# Altium PCB EnergyHarvestingBoard.PcbDoc
Units mil, origin at the board's own origin, x right, y up, seen from the top; angles counter-clockwise.
Board outline 6502 x 758 mil, 2 copper layers (Top Layer, Bottom Layer); 85 components, 43 nets, 173 pads, 64 vias.
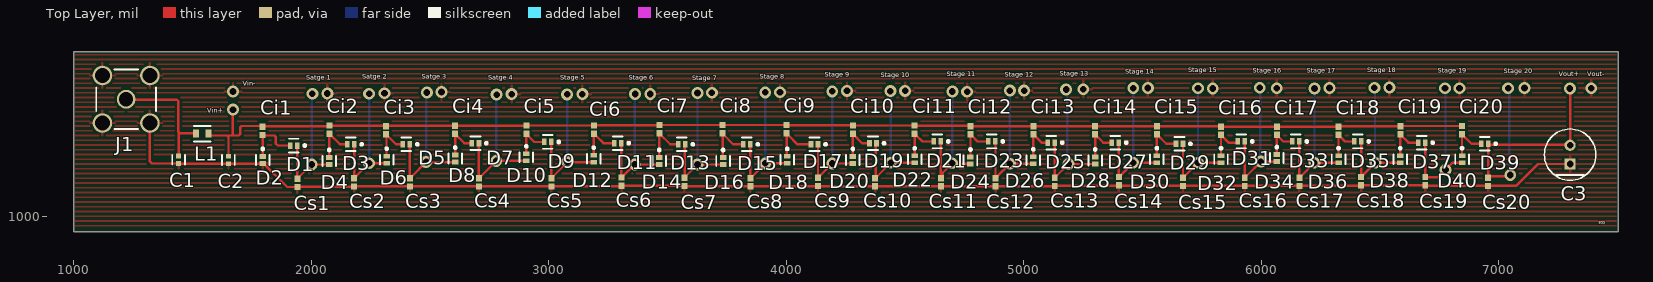
[diagram p0: Top Layer view]
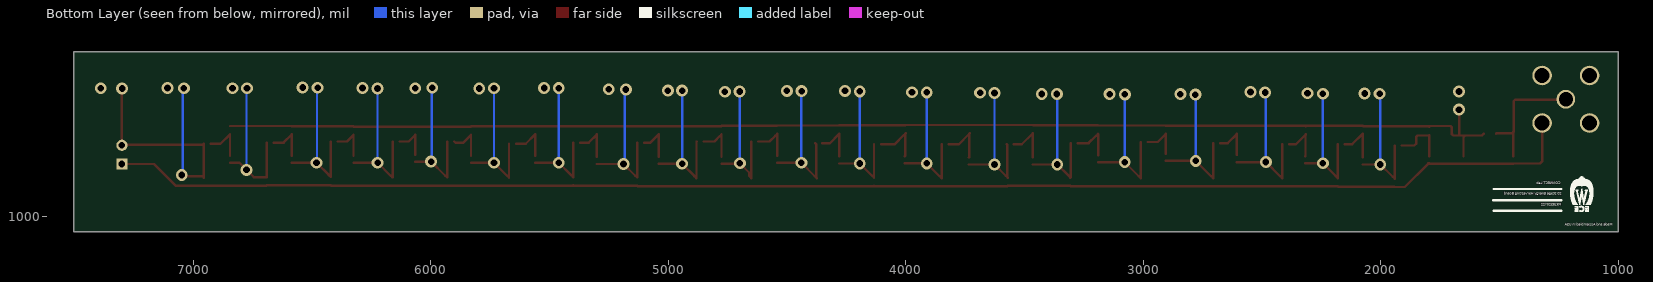
[diagram p1: Bottom Layer view, seen from below]
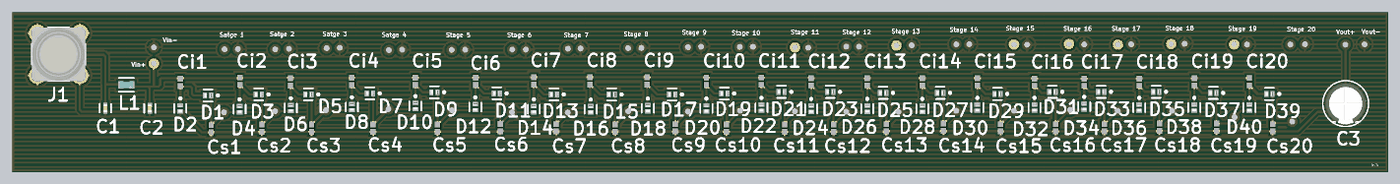
[diagram p2: 3D render of the assembled board from above, using the file's embedded part models]

## Layer stack, top to bottom
Top Solder: solder mask 0.4, Solder Resist, Dk 3.5
Top Layer: signal copper 1.4
Dielectric 1: dielectric 12.6, FR-4, Dk 4.8
Bottom Layer: signal copper 1.4
Bottom Solder: solder mask 0.4, Solder Resist, Dk 3.5

## Board outline
1000,934 7502,934 7502,1692 1000,1692

## Design rules (kind name [scope] priority, off if disabled: settings)
Clearance [All] p1: gap=10 ignorepadtopadclearanceinfootprint=TRUE except(0: Arc-Hole Track-Hole SMDPad-Hole THPad-Hole Via-Hole Fill-Hole Poly-Hole Region-Hole Text-Hole)
HoleSize [IsVia] p1: absolutevalues=TRUE maxlimit=100 minlimit=1 maxpercent=80.000 minpercent=20.000
MinimumSolderMaskSliver [All] p1: minsoldermaskwidth=1
PolygonConnect [All] p1: connectstyle=Relief reliefconductorwidth=10 reliefentries=4 polygonreliefangle="90 Angle" airgapwidth=10
RoutingVias [All] p1: holewidth=28 width=50 viastyle="Through Hole" minholewidth=28 minwidth=50 maxholewidth=28 maxwidth=50
SilkToSilkClearance [All] p1: silktosilkclearance=1
SolderMaskExpansion [All] p1: expansion=4 istentingtop=FALSE
Width [All] p1: maxlimit=10 minlimit=10 preferedwidth=10
27 further rules are at their usual default settings.

## Components (designator, comment, footprint, x,y, rotation, side; value= is the part's Value field where it differs from the comment)
C1 "1pF" FP-CBR04C-MFG 1440.75,1237.68 r270 top value="1.0 pF"
C2 "1.5pF" FP-CBR04C-MFG 1650.75,1236.93 r270 top value="1.5 pF"
C3 "EEUEB1JR47S" FP-RAD-TH-D_5_0_5-L_11_1-MFG 7300,1259.37 r90 top
Ci1 "47pF" CAPC1005X56X25NL10T15 1795,1359.65 r270 top
Ci2 "47pF" CAPC1005X56X25NL10T15 2075.75,1365 r270 top
Ci3 "47pF" CAPC1005X56X25NL10T15 2315,1361.97 r270 top
Ci4 "47pF" CAPC1005X56X25NL10T15 2605,1364.29 r270 top
Ci5 "47pF" CAPC1005X56X25NL10T15 2905,1364.65 r270 top
Ci6 "47pF" CAPC1005X56X25NL10T15 3190,1364.65 r270 top
Ci7 "47pF" CAPC1005X56X25NL10T15 3465,1366.97 r270 top
Ci8 "47pF" CAPC1005X56X25NL10T15 3730,1366.97 r270 top
Ci9 "47pF" CAPC1005X56X25NL10T15 4000,1366.97 r270 top
Ci10 "47pF" CAPC1005X56X25NL10T15 4280,1364.65 r270 top
Ci11 "47pF" CAPC1005X56X25NL10T15 4540,1365 r270 top
Ci12 "47pF" CAPC1005X56X25NL10T15 4775,1362.32 r270 top
Ci13 "47pF" CAPC1005X56X25NL10T15 5040,1362.32 r270 top
Ci14 "47pF" CAPC1005X56X25NL10T15 5300,1362.32 r270 top
Ci15 "47pF" CAPC1005X56X25NL10T15 5560,1362.32 r270 top
Ci16 "47pF" CAPC1005X56X25NL10T15 5830,1360 r270 top
Ci17 "47pF" CAPC1005X56X25NL10T15 6065,1360 r270 top
Ci18 "47pF" CAPC1005X56X25NL10T15 6325,1360 r270 top
Ci19 "47pF" CAPC1005X56X25NL10T15 6585,1362.32 r270 top
Ci20 "47pF" CAPC1005X56X25NL10T15 6845,1362.68 r270 top
Cs1 "47pF" CAPC1005X56X25NL10T15 1940.75,1140.35 r270 top
Cs2 "47pF" CAPC1005X56X25NL10T15 2180,1142.91 r270 top
Cs3 "47pF" CAPC1005X56X25NL10T15 2415,1142.91 r270 top
Cs4 "47pF" CAPC1005X56X25NL10T15 2705.35,1142.91 r270 top
Cs5 "47pF" CAPC1005X56X25NL10T15 3010,1142.91 r270 top
Cs6 "47pF" CAPC1005X56X25NL10T15 3306,1145.59 r270 top
Cs7 "47pF" CAPC1005X56X25NL10T15 3570,1145 r270 top
Cs8 "47pF" CAPC1005X56X25NL10T15 3848.39,1143 r270 top
Cs9 "47pF" CAPC1005X56X25NL10T15 4133,1145 r270 top
Cs10 "47pF" CAPC1005X56X25NL10T15 4374,1143 r270 top
Cs11 "47pF" CAPC1005X56X25NL10T15 4650,1143 r270 top
Cs12 "47pF" CAPC1005X56X25NL10T15 4881,1143.32 r270 top
Cs13 "47pF" CAPC1005X56X25NL10T15 5130,1145 r270 top
Cs14 "47pF" CAPC1005X56X25NL10T15 5400,1147.68 r270 top
Cs15 "47pF" CAPC1005X56X25NL10T15 5670,1145 r270 top
Cs16 "47pF" CAPC1005X56X25NL10T15 5930,1145 r270 top
Cs17 "47pF" CAPC1005X56X25NL10T15 6160,1145 r270 top
Cs18 "47pF" CAPC1005X56X25NL10T15 6420,1147.68 r270 top
Cs19 "47pF" CAPC1005X56X25NL10T15 6690,1147.68 r270 top
Cs20 "47pF" CAPC1005X56X25NL10T15 6955,1145 r270 top
D1 "CDBQR0130L" FP-0402-SOD-923F-MFG 1925.75,1297.68 r180 top
D2 "CDBQR0130L" FP-0402-SOD-923F-MFG 1795,1237.2 r270 top
D3 "CDBQR0130L" FP-0402-SOD-923F-MFG 2165.24,1302.91 r180 top
D4 "CDBQR0130L" FP-0402-SOD-923F-MFG 2075,1232.91 r270 top
D5 "CDBQR0130L" FP-0402-SOD-923F-MFG 2400,1302.91 r180 top
D6 "CDBQR0130L" FP-0402-SOD-923F-MFG 2317,1238.15 r270 top
D7 "CDBQR0130L" FP-0402-SOD-923F-MFG 2690.59,1307.91 r180 top
D8 "CDBQR0130L" FP-0402-SOD-923F-MFG 2605.35,1242.91 r270 top
D9 "CDBQR0130L" FP-0402-SOD-923F-MFG 2995,1312.91 r180 top
D10 "CDBQR0130L" FP-0402-SOD-923F-MFG 2905,1247.91 r270 top
D11 "CDBQR0130L" FP-0402-SOD-923F-MFG 3290,1307.91 r180 top
D12 "CDBQR0130L" FP-0402-SOD-923F-MFG 3188.39,1242.44 r270 top
D13 "CDBQR0130L" FP-0402-SOD-923F-MFG 3560,1302.91 r180 top
D14 "CDBQR0130L" FP-0402-SOD-923F-MFG 3465,1232.91 r270 top
D15 "CDBQR0130L" FP-0402-SOD-923F-MFG 3833.39,1302.68 r180 top
D16 "CDBQR0130L" FP-0402-SOD-923F-MFG 3733.39,1232.68 r270 top
D17 "CDBQR0130L" FP-0402-SOD-923F-MFG 4118.39,1302.68 r180 top
D18 "CDBQR0130L" FP-0402-SOD-923F-MFG 4003.39,1237.44 r270 top
D19 "CDBQR0130L" FP-0402-SOD-923F-MFG 4365,1306.97 r180 top
D20 "CDBQR0130L" FP-0402-SOD-923F-MFG 4280,1236.97 r270 top
D21 "CDBQR0130L" FP-0402-SOD-923F-MFG 4635,1315 r180 top
D22 "CDBQR0130L" FP-0402-SOD-923F-MFG 4540,1240 r270 top
D23 "CDBQR0130L" FP-0402-SOD-923F-MFG 4865,1315 r180 top
D24 "CDBQR0130L" FP-0402-SOD-923F-MFG 4775,1235 r270 top
D25 "CDBQR0130L" FP-0402-SOD-923F-MFG 5115,1310 r180 top
D26 "CDBQR0130L" FP-0402-SOD-923F-MFG 5040,1235.24 r270 top
D27 "CDBQR0130L" FP-0402-SOD-923F-MFG 5384.76,1310 r180 top
D28 "CDBQR0130L" FP-0402-SOD-923F-MFG 5300,1235 r270 top
D29 "CDBQR0130L" FP-0402-SOD-923F-MFG 5655,1305 r180 top
D30 "CDBQR0130L" FP-0402-SOD-923F-MFG 5560,1240.24 r270 top
D31 "CDBQR0130L" FP-0402-SOD-923F-MFG 5915,1315 r180 top
D32 "CDBQR0130L" FP-0402-SOD-923F-MFG 5830,1240.24 r270 top
D33 "CDBQR0130L" FP-0402-SOD-923F-MFG 6145.24,1315 r180 top
D34 "CDBQR0130L" FP-0402-SOD-923F-MFG 6065,1245 r270 top
D35 "CDBQR0130L" FP-0402-SOD-923F-MFG 6405.24,1315 r180 top
D36 "CDBQR0130L" FP-0402-SOD-923F-MFG 6325,1240 r270 top
D37 "CDBQR0130L" FP-0402-SOD-923F-MFG 6675,1310 r180 top
D38 "CDBQR0130L" FP-0402-SOD-923F-MFG 6585,1240.24 r270 top
D39 "CDBQR0130L" FP-0402-SOD-923F-MFG 6940,1305 r180 top
D40 "CDBQR0130L" FP-0402-SOD-923F-MFG 6845,1240 r270 top
J1 "5-1814832-1" TECO-5-1814832-1_V 1220,1492.68 r0 top
L1 "6.8nH" FP-LQW18AN_00-MFG 1540,1347.68 r0 top

## Footprints (in the part's own frame and the unit in brackets; to place one, negate y for a bottom-side part, rotate by r counter-clockwise, add the part's x,y. Pads: shape width x height; smd on the part's side, far side on the other; paste and mask are expansions set on the pad)
CAPC1005X56X25NL10T15 [mm] "Chip Capacitor, 2-Leads, Body 1.00x0.50mm, IPC Medium Density"
  rect 0.68x0.64 smd: 1(-0.44,0) 2(0.44,0)
  body extent -0.55,-0.3 0.55,0.3, height 0.56
FP-0402-SOD-923F-MFG [mm]
  rect 0.5x0.7 smd paste+0 mask+0: 1(-0.375,0) 2(0.375,0)
  silkscreen extent -1.3,-0.72 0.53,0.72, body extent -0.72,-0.45 0.72,0.45, height 0.25
FP-CBR04C-MFG [mm]
  rect 0.52x0.52 smd paste+0 mask+0: 1(-0.4,0) 2(0.4,0)
  silkscreen extent -0.53,-0.68 0.53,0.67, body extent -0.8,-0.4 0.8,0.4, height 0.25
FP-LQW18AN_00-MFG [mm]
  rect 0.625x0.85 smd paste+0 mask+0: 1(-0.663,0) 2(0.663,0)
  silkscreen extent -0.9,-0.82 0.9,0.82, body extent -1.07,-0.6 1.07,0.6, height 0.25
FP-RAD-TH-D_5_0_5-L_11_1-MFG [mm]
  rect 1.2x1.2 hole 0.7 paste-1000 mask+0: 1(-1,0)
  round 1.2 hole 0.7 paste-1000 mask+0: 2(1,0)
  silkscreen extent -2.75,-2.75 2.75,2.75, body extent -2.85,-2.85 2.85,2.85, height 0.25
TECO-5-1814832-1_V [mm] "THD, 5-Leads, Body 6.4x6.4mm, Pitch 5.08mm"
  round 2 hole 1.5: 1(0,0)
  round 2.1 hole 1.6: 2(-2.54,2.54) 3(-2.54,-2.54) 4(2.54,-2.54) 5(2.54,2.54)
  silkscreen extent -3.2,-3.2 3.2,3.2, body extent -3.21,-3.21 3.19,3.19, height 9.5

## Part data
C1: library part CMP-03020-014457-1, "CAP CER 1PF 100V C0G/NP0 0402", Capacitance="1.0 pF", Manufacturer=KEMET, Manufacturer Part Number=CBR04C109B1GAC, Package=CBR04C, Temperature="-55°C to +125°C", Temperature Characteristic=C0G, Temperature Coefficient=30ppm/°C, Temperature Range High=+125°C, Temperature Range Low=-55°C, Tolerance="0.1 pF", Voltage Rating="100 V", Automotive=No, Category=Cap, ComponentLink2Description=Datasheet, ComponentLink2URL=https://content.kemet.com/datasheets/KEM_C1030_CBR_SMD.pdf, Device Class L1="Passive Components", Device Class L2=Capacitors, Device Class L3="Ceramic Capacitors", Digikey Description="CAP CER 1PF 100V C0G/NP0 0402", Height=0.55mm, Ipc Land Pattern Name=CAPC10050X50, Lead Free=Yes, Material=Ceramic, Mouser Description="Cap Ceramic 1pF 100V C0G 0.1pF Pad SMD 0402 125C Medical T/R", Octopart=https://octopart.com/cbr04c109b1gac-kemet-23816354, RoHS=TRUE
C2: library part CMP-03020-033608-1, "CAP CER 1.5PF 100V C0G/NP0 0402", Capacitance="1.5 pF", Manufacturer=KEMET, Manufacturer Part Number=CBR04C159B1GAC, Package=CBR04C, Temperature="-55°C to +125°C", Temperature Characteristic=C0G, Temperature Coefficient=30ppm/°C, Temperature Range High=+125°C, Temperature Range Low=-55°C, Tolerance="0.1 pF", Voltage Rating="100 V", Automotive=No, Category=Cap, ComponentLink2Description=Datasheet, ComponentLink2URL=https://content.kemet.com/datasheets/KEM_C1030_CBR_SMD.pdf, Device Class L1="Passive Components", Device Class L2=Capacitors, Device Class L3="Ceramic Capacitors", Digikey Description="CAP CER 1.5PF 100V C0G/NP0 0402", Height=0.55mm, Ipc Land Pattern Name=CAPC10050X50, Lead Free=Yes, Material=Ceramic, Octopart=https://octopart.com/cbr04c159b1gac-kemet-23816356, RoHS=TRUE
C3: library part CMP-05427-001047-1, "Aluminum Electrolytic Capacitors (Radial Lead Type) 0.47uF ±20% 63V", Capacitance=470nF, Case/Package=Radial, Leakage Current=3uA, Max Operating Temperature=105°C, Min Operating Temperature=-40°C, Package Quantity=200, Ripple Current=4.5mA, Tolerance=20%, Voltage=63V, Construction=RADIAL, Diameter=5mm, Height=11mm, Height - Seated (Max)=0.433inch, Lead Diameter=0.5mm, Lead Free="Lead Free", Lead Pitch=2mm, Length=11mm, Life (Hours)=5000Hour, Mount="Through Hole", Number of Pins=2, Packaging=Bulk, Polarity=Polar, Radiation Hardening=No, REACH SVHC="No SVHC", Ripple Current (AC)=4.5mA, RoHS Compliant=Yes, Series=EB, Termination=Radial, Voltage Rating=63V, Voltage Rating (DC)=63V
Ci1 Ci2 Ci3 Ci4 Ci5 Ci6 Ci7 Ci8 Ci9 Ci10 Ci11 Ci12 Ci13 Ci14 Ci15 Ci16 Ci17 Ci18 Ci19 Ci20 Cs1 Cs2 Cs3 Cs4 Cs5 Cs6 Cs7 Cs8 Cs9 Cs10 Cs11 Cs12 Cs13 Cs14 Cs15 Cs16 Cs17 Cs18 Cs19 Cs20: library part CMP-2008-02783-1, Manufacturer="AVX Interconnect / Elco", Part Number=0402YA470KAT2A
D1 D2 D3 D4 D5 D6 D7 D8 D9 D10 D11 D12 D13 D14 D15 D16 D17 D18 D19 D20 D21 D22 D23 D24 D25 D26 D27 D28 D29 D30 D31 D32 D33 D34 D35 D36 D37 D38 D39 D40: library part CMP-20227-000005-1, "DIODE SCHOTTKY 30V 100MA 0402", Average Rectified Current=100mA, Case Code (Imperial)=0402, Case Code (Metric)=1005, Max Reverse Leakage Current=10uA, Max Reverse Voltage (DC)=30V, Max Surge Current=1A, Package Quantity=1, Case/Package=0402, Mount="Surface Mount", Packaging="Tape and Reel"
J1: library part CMP-2000-05415-1, "SMA Connector, Pitch 5.08 mm, 1 Position, Height 9.5 mm, Tail Length 4 mm, -65 to 165 degC, RoHS, Bulk", Frequency Max=3GHz, Manufacturer="TE Connectivity", Package Description="SMA Connector, Pitch 5.08 mm, 1 Position, Height 9.5 mm, Tail Length 4 mm", Coaxial Cable Types=-, Coaxial Termination=Solder, Connector Body Style=StraightJack, Connector Mounting=PCBMount, Connector Type=SMACoaxial, Contact Material=BerylliumCopper, Contact Plating=GoldPlatedContacts, Datasheet URL=http://www.onlinecomponents.com/productFiles/mf-AMP/eng_cd_1814832_a.pdf, Datasheet Version="Rev. B1, 03/2011", Impedance=50ohm, Manufacturer URL=http://www.te.com/, Package Reference=5-1814832-1, Product Range=ZDCSeries, SVHC=NoSVHC(15-Jun-2015)
L1: library part CMP-06042-000801-1, "Wire Wound RF Inductor 6.8nH ±0.5nH 750mA 0.082Ω 0603 (1608)", Case Code (Imperial)=0603, Case Code (Metric)=1608, Current Rating=750mA, DC Resistance (DCR)=82mR, Max Operating Temperature=125°C, Min Operating Temperature=-55°C, Package Quantity=4000, Resistor Type=Wirewound, Self Resonant Frequency=6GHz, Test Frequency=100MHz, Case/Package=0603, Core Material=Non-Magnetic, DC Current=750mA, Depth=1mm, Height=0.8mm, Height - Seated (Max)=0.039inch, Inductance=6.8nH, Lead Free="Lead Free", Length=1.6mm, Max DC Current=750mA, Military Standard=Not, Mount="Surface Mount", Packaging="Tape and Reel", Q Factor=35, Radiation Hardening=No, Series Resistance=82mR, Shielding=Unshielded, Termination=SMD/SMT, Weight=0.000106oz, Width=0.031inch

## Via types
v1: diameter 50, hole 28, Top Layer to Bottom Layer, 64 vias

## Nets (pads, with @x,y where several pads share a name; then routed paths per layer and width w, separated by ;. In a path a pad name is that pad's centre, name@x,y a point inside that pad or via, vN(x,y) a via of type N, cw(c..) or ccw(c..) an arc to the next point about the centre after c; other vN are vias at no path point)
GND: C1.2 C2.2 C3.1 Cs1.2 Cs2.2 Cs3.2 Cs4.2 Cs5.2 Cs6.2 Cs7.2 Cs8.2 Cs9.2 Cs10.2 Cs11.2 Cs12.2 Cs13.2 Cs14.2 Cs15.2 Cs16.2 Cs17.2 Cs18.2 Cs19.2 Cs20.2 D2.2 J1.2 J1.3 J1.4 J1.5 | length 6235.9
  Top Layer w10: J1.4 1320,1230.86 1328.93,1221.93 C1.2 1441.12,1221.56 1650.37,1221.56 C2.2 1651.38,1221.81 1794.37,1221.81 D2.2 1798.94,1222.44 1898.35,1123.03 Cs1.2 1942.03,1124.31 2178.72,1124.31 Cs2.2 Cs3.2 Cs4.2 Cs5.2 3011.34,1126.93 3304.66,1126.93 Cs6.2 3306.3,1127.97 3569.7,1127.97 Cs7.2 3571,1126.68 3847.39,1126.68 Cs8.2 3849.39,1126.68 4132,1126.68 Cs9.2 4134,1126.68 4373,1126.68 Cs10.2 Cs11.2 4650.16,1125.84 4880.84,1125.84 Cs12.2 4881.84,1126.84 5129.16,1126.84 Cs13.2 5131.34,1129.02 5398.66,1129.02 Cs14.2 5401.34,1129.02 5668.66,1129.02 Cs15.2 Cs16.2 Cs17.2 6161.34,1129.02 6418.66,1129.02 Cs18.2 Cs19.2 6691.34,1129.02 6953.66,1129.02 Cs20.2 7072.7,1127.68 7165.02,1220 C3.1
  other v1: 2843,1514 3141,1514 3427,1515 2067,1517 2308,1518 3686,1520 3973,1522 2548,1523 4761,1524 1670,1525 4255,1528 4500,1528 5001,1529 5250,1535 5795,1538 6065,1539 6834,1539 7389,1539 5522,1540 6287,1540 7108,1540 6539,1542
NetC1_1: C1.1 J1.1 L1.1 | length 530.8
  Top Layer w10: J1.1 1222.68,1490 1434.14,1490 1440,1484.14 1440,1355.86 1440.75,1355.11 ; C1.1 1440.75,1355.11 ; L1.1 1511.59,1350 1445.86,1350 1440.75,1355.11
NetC2_1: C2.1 Ci1.1 Ci2.1 Ci3.1 Ci4.1 Ci5.1 Ci6.1 Ci7.1 Ci8.1 Ci9.1 Ci10.1 Ci11.1 Ci12.1 Ci13.1 Ci14.1 Ci15.1 Ci16.1 Ci17.1 Ci18.1 Ci19.1 Ci20.1 L1.2 | length 5525.5
  Top Layer w10: L1.2 1566.08,1347.3 1573.39,1340 1644.89,1340 ; C2.1 1650.75,1334.14 1644.89,1340 ; v1(1670,1449) 1669.52,1448.52 1669.52,1340 ; Ci20.1 6844.82,1379.82 6585.18,1379.82 Ci19.1 6583.84,1378.48 6326.16,1378.48 Ci18.1 Ci17.1 Ci16.1 5828.84,1378.48 5561.16,1378.48 Ci15.1 Ci14.1 Ci13.1 Ci12.1 4773.66,1380.98 4541.34,1380.98 Ci11.1 4539.82,1382.15 4280.18,1382.15 Ci10.1 4278.84,1383.13 4001.16,1383.13 Ci9.1 Ci8.1 Ci7.1 3463.84,1383.13 3191.16,1383.13 Ci6.1 Ci5.1 2904.82,1381.79 2605.18,1381.79 Ci4.1 2603.84,1380.45 2316.16,1380.45 Ci3.1 2313.48,1380.81 2077.26,1380.81 Ci2.1 2073.07,1379.65 1797.68,1379.65 Ci1.1 1791.97,1380 1705.86,1380 1700,1374.14 1700,1345.86 1694.14,1340 1669.52,1340 ; 1644.89,1340 1669.52,1340
NetCi1_2: Ci1.2 D1.2 D2.1 | length 241.4
  Top Layer w10: D2.1 Ci1.2 1797.32,1340 1844.14,1340 1850,1334.14 1850,1305.86 1858.18,1297.68 D1.2
NetCi2_2: Ci2.2 D3.2 D4.1 | length 194
  Top Layer w10: D4.1 2075.37,1248.05 2075.37,1347.3 Ci2.2 2075.75,1346.89 2119.72,1302.91 D3.2
NetCi3_2: Ci3.2 D5.2 D6.1 | length 180.5
  Top Layer w10: D6.1 2316,1253.91 Ci3.2@2316,1342.86 ; D5.2 2355.94,1302.91 Ci3.2@2316,1342.86 ; Ci3.2@2316,1342.86 2316,1343.65 Ci3.2 2315,1343.86 Ci3.2@2316,1342.86
NetCi4_2: Ci4.2 D7.2 D8.1 | length 175.9
  Top Layer w10: Ci4.2 2605,1346.18 Ci4.2@2605.18,1346 ; D8.1 2605.18,1257.85 Ci4.2@2605.18,1346 ; D7.2 2643.27,1307.91 Ci4.2@2605.18,1346
NetCi5_2: Ci5.2 D9.2 D10.1 | length 173.8
  Top Layer w10: D10.1 Ci5.2@2905,1346.54 ; Ci5.2 Ci5.2@2905,1346.54 ; D9.2 2938.62,1312.91 Ci5.2@2905,1346.54
NetCi6_2: Ci6.2 D11.2 D12.1 | length 192.8
  Top Layer w10: D12.1 3189.19,1258.01 3189.19,1346.52 Ci6.2 3190,1346.54 3197.6,1338.94 3198.39,1338.94 3229.41,1307.91 D11.2
NetCi7_2: Ci7.2 D13.2 D14.1 | length 201.2
  Top Layer w10: D14.1 Ci7.2@3465,1348.86 ; Ci7.2 Ci7.2@3465,1348.86 ; D13.2 3510.94,1302.91 Ci7.2@3465,1348.86
NetCi8_2: Ci8.2 D15.2 D16.1 | length 209
  Top Layer w10: Ci8.2 3730,1348.86 Ci8.2@3731.69,1347.17 ; D16.1 3731.69,1249.13 Ci8.2@3731.69,1347.17 ; D15.2 3776.18,1302.68 Ci8.2@3731.69,1347.17
NetCi9_2: Ci9.2 D17.2 D18.1 | length 219.2
  Top Layer w10: Ci9.2 4000,1348.86 Ci9.2@4001.69,1347.17 ; D18.1 4001.69,1253.9 Ci9.2@4001.69,1347.17 ; D17.2 4046.97,1302.68 4008.39,1341.26 4007.6,1341.26 Ci9.2@4001.69,1347.17
NetCi10_2: Ci10.2 D19.2 D20.1 | length 182.2
  Top Layer w10: D20.1 Ci10.2@4280,1346.54 ; Ci10.2 Ci10.2@4280,1346.54 ; D19.2 4319.57,1306.97 Ci10.2@4280,1346.54
NetCi11_2: Ci11.2 D21.2 D22.1 | length 186.4
  Top Layer w10: D22.1 Ci11.2@4540,1346.89 ; Ci11.2 Ci11.2@4540,1346.89 ; D21.2 4572.68,1315 4548.39,1339.29 4547.6,1339.29 Ci11.2@4540,1346.89
NetCi12_2: Ci12.2 D23.2 D24.1 | length 182.6
  Top Layer w10: D24.1 Ci12.2@4775,1344.21 ; Ci12.2 Ci12.2@4775,1344.21 ; D23.2 4805,1315 4783.39,1336.61 4782.6,1336.61 Ci12.2@4775,1344.21
NetCi13_2: Ci13.2 D25.2 D26.1 | length 169.4
  Top Layer w10: D26.1 Ci13.2@5040,1344.21 ; Ci13.2 Ci13.2@5040,1344.21 ; D25.2 5074.21,1310 Ci13.2@5040,1344.21
NetCi14_2: Ci14.2 D27.2 D28.1 | length 179.4
  Top Layer w10: D28.1 Ci14.2@5300,1344.21 ; Ci14.2 Ci14.2@5300,1344.21 ; D27.2 5334.21,1310 Ci14.2@5300,1344.21
NetCi15_2: Ci15.2 D29.2 D30.1 | length 186.5
  Top Layer w10: D30.1 Ci15.2@5560,1344.21 ; Ci15.2 Ci15.2@5560,1344.21 ; D29.2 5599.21,1305 Ci15.2@5560,1344.21
NetCi16_2: Ci16.2 D31.2 D32.1 | length 173.3
  Top Layer w10: D32.1 Ci16.2@5830,1341.89 ; Ci16.2 Ci16.2@5830,1341.89 ; D31.2 5900.24,1314.84 5895.39,1310 5861.89,1310 Ci16.2@5830,1341.89
NetCi17_2: Ci17.2 D33.2 D34.1 | length 159.5
  Top Layer w10: D34.1 Ci17.2@6065,1341.89 ; Ci17.2 Ci17.2@6065,1341.89 ; D33.2 6091.89,1315 Ci17.2@6065,1341.89
NetCi18_2: Ci18.2 D35.2 D36.1 | length 164.5
  Top Layer w10: D36.1 Ci18.2@6325,1341.89 ; Ci18.2 Ci18.2@6325,1341.89 ; D35.2 6351.89,1315 Ci18.2@6325,1341.89
NetCi19_2: Ci19.2 D37.2 D38.1 | length 179.4
  Top Layer w10: D38.1 Ci19.2@6585,1344.21 ; Ci19.2 Ci19.2@6585,1344.21 ; D37.2 6619.21,1310 Ci19.2@6585,1344.21
NetCi20_2: Ci20.2 D39.2 D40.1 | length 187.2
  Top Layer w10: D40.1 Ci20.2@6845,1344.57 ; Ci20.2 Ci20.2@6845,1344.57 ; D39.2 6884.57,1305 Ci20.2@6845,1344.57
"Stage 1": Cs1.1 D1.1 D4.2 | length 598.9
  Top Layer w10: D1.1 1940.63,1297.56 1940.63,1157.8 Cs1.1 1940.75,1158.46 1948.35,1166.06 1949.13,1166.06 v1(2001.22,1218.15) D4.2
  Bottom Layer w10: v1(2001.22,1218.15) 2001.22,1513.22 v1(2004,1516)
"Stage 2": Cs2.1 D3.1 D6.2 | length 598.2
  Top Layer w10: Cs2.1 Cs2.1@2180,1161.02 ; D3.1 Cs2.1@2180,1161.02 ; D6.2 v1(2243.15,1223.39) 2188.39,1168.62 2187.6,1168.62 Cs2.1@2180,1161.02
  Bottom Layer w10: v1@2243,1516 v1(2243.15,1515.85) v1(2243.15,1223.39)
"Stage 3": Cs3.1 D5.1 D8.2 | length 655.9
  Top Layer w10: D5.1 2414.88,1302.8 2414.88,1160.35 Cs3.1 2415,1161.02 2422.6,1168.62 2423.39,1168.62 v1(2482.91,1228.15) D8.2
  Bottom Layer w10: v1(2482.91,1228.15) 2482.91,1517.91 v1(2486,1521)
"Stage 4": Cs4.1 D7.1 D10.2 | length 656.8
  Top Layer w10: Cs4.1 Cs4.1@2705.35,1161.02 ; D7.1 Cs4.1@2705.35,1161.02 ; D10.2 v1(2778.27,1233.15) 2713.74,1168.62 2712.95,1168.62 Cs4.1@2705.35,1161.02
  Bottom Layer w10: v1(2778.27,1233.15) 2778.27,1510.27 v1(2780,1512)
"Stage 5": Cs5.1 D9.1 D12.2 | length 645.1
  Top Layer w10: D9.1 3009.88,1312.8 3009.88,1160.35 Cs5.1 3010,1161.02 3017.6,1168.62 3018.39,1168.62 v1(3077.44,1227.68) D12.2
  Bottom Layer w10: v1(3077,1513) 3077.44,1512.56 v1(3077.44,1227.68)
"Stage 6": Cs6.1 D11.1 D14.2 | length 625.4
  Top Layer w10: D11.1 3305.38,1307.3 3305.38,1163.53 Cs6.1 3306,1163.7 3313.6,1171.3 3314.39,1171.3 v1(3361.24,1218.15) D14.2
  Bottom Layer w10: v1(3361.24,1218.15) 3361.24,1513.24 v1(3363,1515)
"Stage 7": Cs7.1 D13.1 D16.2 | length 626.5
  Top Layer w10: Cs7.1 3570,1163.11 Cs7.1@3572.38,1165.49 ; D13.1 3572.38,1300.53 Cs7.1@3572.38,1165.49 ; D16.2 v1(3625.59,1217.91) 3578.39,1170.71 3577.6,1170.71 Cs7.1@3572.38,1165.49
  Bottom Layer w10: v1(3625.59,1217.91) 3625.59,1518.59 v1(3626,1519)
"Stage 8": Cs8.1 D15.1 D18.2 | length 626
  Top Layer w10: D15.1 3848.27,1302.56 3848.27,1160.44 Cs8.1 3848.39,1161.11 3855.98,1168.71 3856.77,1168.71 v1(3910.74,1222.68) D18.2
  Bottom Layer w10: v1(3910.74,1222.68) v1(3910.74,1521.74) v1@3913,1524
"Stage 9": Cs9.1 D17.1 D20.2 | length 615.6
  Top Layer w10: Cs9.1 4133,1163.11 Cs9.1@4133.07,1163.18 ; D17.1 4133.07,1302.6 Cs9.1@4133.07,1163.18 ; D20.2 v1(4192.88,1222.2) 4141.39,1170.71 4140.6,1170.71 Cs9.1@4133.07,1163.18
  Bottom Layer w10: v1(4192.88,1222.2) v1(4192.88,1525.88) v1@4193,1526
"Stage 10": Cs10.1 D19.1 D22.2 | length 639.7
  Top Layer w10: Cs10.1 4374,1161.11 Cs10.1@4376.88,1163.99 ; D19.1 4376.88,1304.09 Cs10.1@4376.88,1163.99 ; D22.2 v1(4438.91,1225.24) 4382.39,1168.71 4381.6,1168.71 Cs10.1@4376.88,1163.99
  Bottom Layer w10: v1(4438,1527) 4438.91,1526.09 v1(4438.91,1225.24)
"Stage 11": Cs11.1 D21.1 D24.2 | length 617.9
  Top Layer w10: D21.1 4649.88,1314.88 4649.88,1160.44 Cs11.1 4650,1161.11 4658.39,1169.5 4658.39,1183.39 v1(4698,1223) 4699.38,1221.62 4773.62,1221.62 D24.2
  Bottom Layer w10: v1(4698,1223) 4698,1524 v1(4699,1525)
"Stage 12": Cs12.1 D23.1 D26.2 | length 648.5
  Top Layer w10: D23.1 4880.38,1314.38 4880.38,1161.26 Cs12.1 4881,1161.43 4888.6,1169.03 4889.39,1169.03 4940.83,1220.47 D26.2
  Bottom Layer w10: v1@4940,1530 v1(4941,1529) v1(4941,1221)
"Stage 13": Cs13.1 D25.1 D28.2 | length 658.8
  Top Layer w10: D25.1 5129.88,1309.88 5129.88,1163.23 5130,1163.11 5137.6,1170.71 5138.39,1170.71 5187.91,1220.24 D28.2
  Bottom Layer w10: v1(5178,1534) 5183,1529 5183,1225 v1(5188,1220)
"Stage 14": Cs14.1 D27.1 D30.2 | length 645.5
  Top Layer w10: D27.1 5399.76,1309.76 5399.76,1165.24 Cs14.1 5400,1165.79 5407.6,1173.39 5408.39,1173.39 v1(5460.47,1225.47) D30.2
  Bottom Layer w10: v1(5460.47,1225.47) v1(5460.47,1539.47) v1@5461,1540
"Stage 15": Cs15.1 D29.1 D32.2 | length 643
  Top Layer w10: D29.1 5669.88,1304.88 5669.88,1162.44 Cs15.1 5670,1163.11 5677.6,1170.71 5678.39,1170.71 v1(5733.15,1225.47) D32.2
  Bottom Layer w10: v1(5733,1539) 5733.15,1538.85 v1(5733.15,1225.47)
"Stage 16": Cs16.1 D31.1 D34.2 | length 627.6
  Top Layer w10: D31.1 5929.88,1314.88 5929.88,1163.23 5930,1163.11 5937.6,1170.71 5938.39,1170.71 v1(5997.91,1230.24) D34.2
  Bottom Layer w10: v1(5993,1541) 5995.46,1538.54 5995.46,1232.69 v1(5997.91,1230.24)
"Stage 17": Cs17.1 D33.1 D36.2 | length 655.8
  Top Layer w10: D33.1 6160,1163.11 6167.6,1170.71 6168.39,1170.71 v1(6222.91,1225.24) D36.2
  Bottom Layer w10: v1(6222.91,1225.24) 6223.46,1225.78 6223.46,1537.46 v1(6224,1538)
"Stage 18": Cs18.1 D35.1 D38.2 | length 656.3
  Top Layer w10: D35.1 6420,1165.79 6427.6,1173.39 6428.39,1173.39 v1(6480.47,1225.47) D38.2
  Bottom Layer w10: v1(6476,1541) 6478.24,1538.76 6478.24,1227.71 v1(6480.47,1225.47)
"Stage 19": Cs19.1 D37.1 D40.2 | length 669.8
  Top Layer w10: D37.1 6689.88,1309.88 6689.88,1165.12 Cs19.1 6745,1165 v1(6775.12,1195.12) 6805.24,1225.24 D40.2
  Bottom Layer w10: v1(6773,1539) 6773,1536 6775.12,1533.88 v1(6775.12,1195.12)
"Stage 20": C3.2 Cs20.1 D39.1 | length 1196.7
  Top Layer w10: D39.1 D39.1@6954.88,1304.88 ; v1(7048,1174) 7042.16,1168.16 6960.84,1168.16 Cs20.1 6954.88,1162.44 D39.1@6954.88,1304.88 ; v1(7299,1538) 7300,1537 C3.2 7296.87,1301.87 6957.89,1301.87 D39.1@6954.88,1304.88
  Bottom Layer w10: v1(7039,1539) 7043.5,1534.5 7043.5,1178.5 v1(7048,1174)

## Polygon pours and split planes (outlines as drawn)
GND on Top Layer "GND_POUR" (hatched Horizontal grid 20 track 8, pour order 1): 1005,1685 7492,1685 7493,1684 7493,944 1006,944 1006,943

## Silkscreen, mask and mechanical layers (free items; w line width, h text height)
Top Overlay:
  text "Stage 18" at 6445.94,1606.5 h19.68
  text "Stage 15" at 5691.94,1605.5 h19.68
  text "Stage 16" at 5963.94,1604.5 h19.68
  text "Stage 17" at 6191.94,1604.5 h19.68
  text "Stage 19" at 6741.94,1604.5 h19.68
  text "Stage 20" at 7019.94,1601.5 h19.68
  text "Stage 14" at 5425.94,1599.5 h19.68
  text "Stage 13" at 5151.94,1591.5 h19.68
  text "Vout-" at 7372.94,1589.94 h19.68
  text "Vout+" at 7252.94,1588.94 h19.68
  text "Stage 11" at 4675.94,1588.5 h19.68
  text "Stage 12" at 4919.94,1587.5 h19.68
  text "Stage 9" at 4161.94,1586.5 h19.68
  text "Stage 10" at 4396.94,1584.5 h19.68
  text "Satge 3" at 2463.94,1579.5 h19.68
  text "Satge 2" at 2214.94,1578.5 h19.68
  text "Stage 8" at 3886.94,1578.5 h19.68
  text "Satge 1" at 1977.94,1575.5 h19.68
  text "Satge 4" at 2743.94,1575.5 h19.68
  text "Stage 5" at 3046.94,1574.5 h19.68
  text "Stage 6" at 3335.94,1574.5 h19.68
  text "Stage 7" at 3603.94,1573.5 h19.68
  text "Vin-" at 1709.94,1549.94 h19.68
  text "Vin+" at 1560.94,1434.94 h19.68
  text "BSS" at 7420,963.22 h19.68
Bottom Overlay:
  drawing of 17 lines, arcs and shapes, not listed
  text "CONNECT Lab" at 1242,1130.04 h19.68
  text "20 Stage Energy Harvesting Board" at 1237,1086.71 h19.68
  text "F918S20Y22" at 1239,1039.27 h19.68
  text "Made and Assembled in USA" at 1022.02,956.22 h19.68